# EAGLE board rev2 12V51A MC34063 15x (EAGLE 8.5.1)
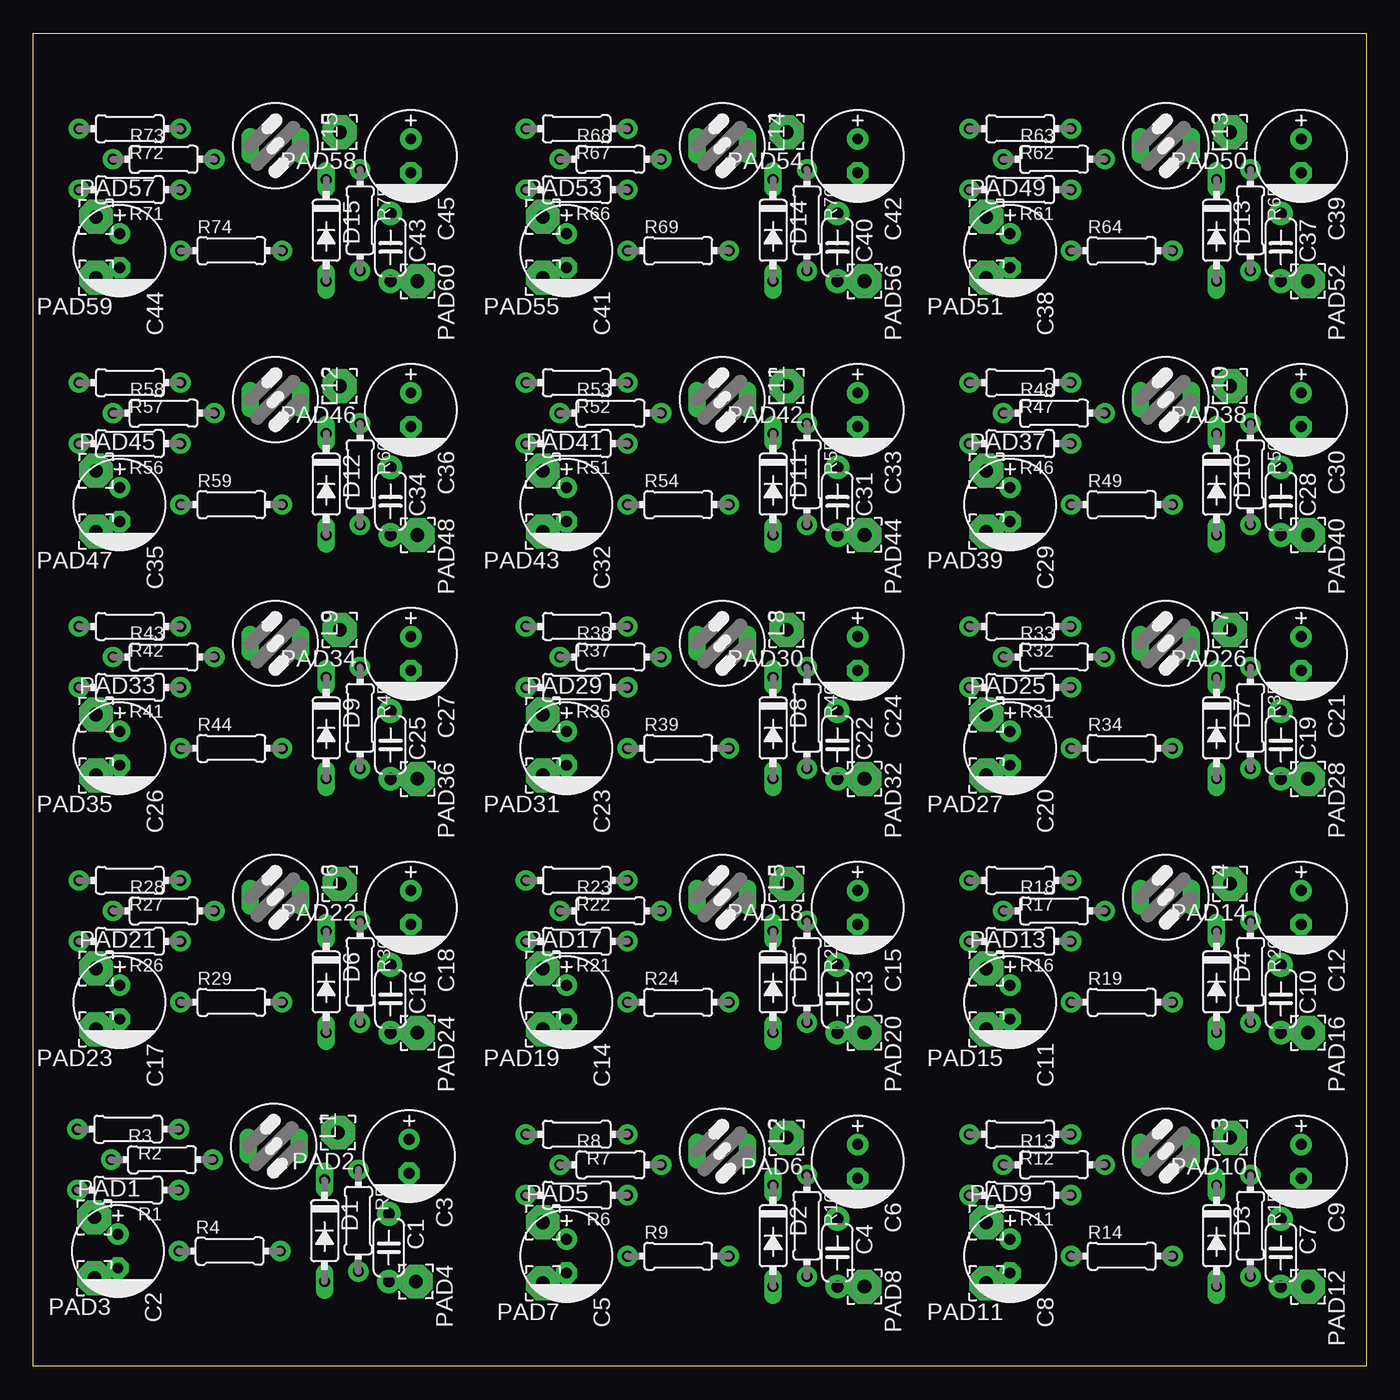
[diagram p0: board, top side]
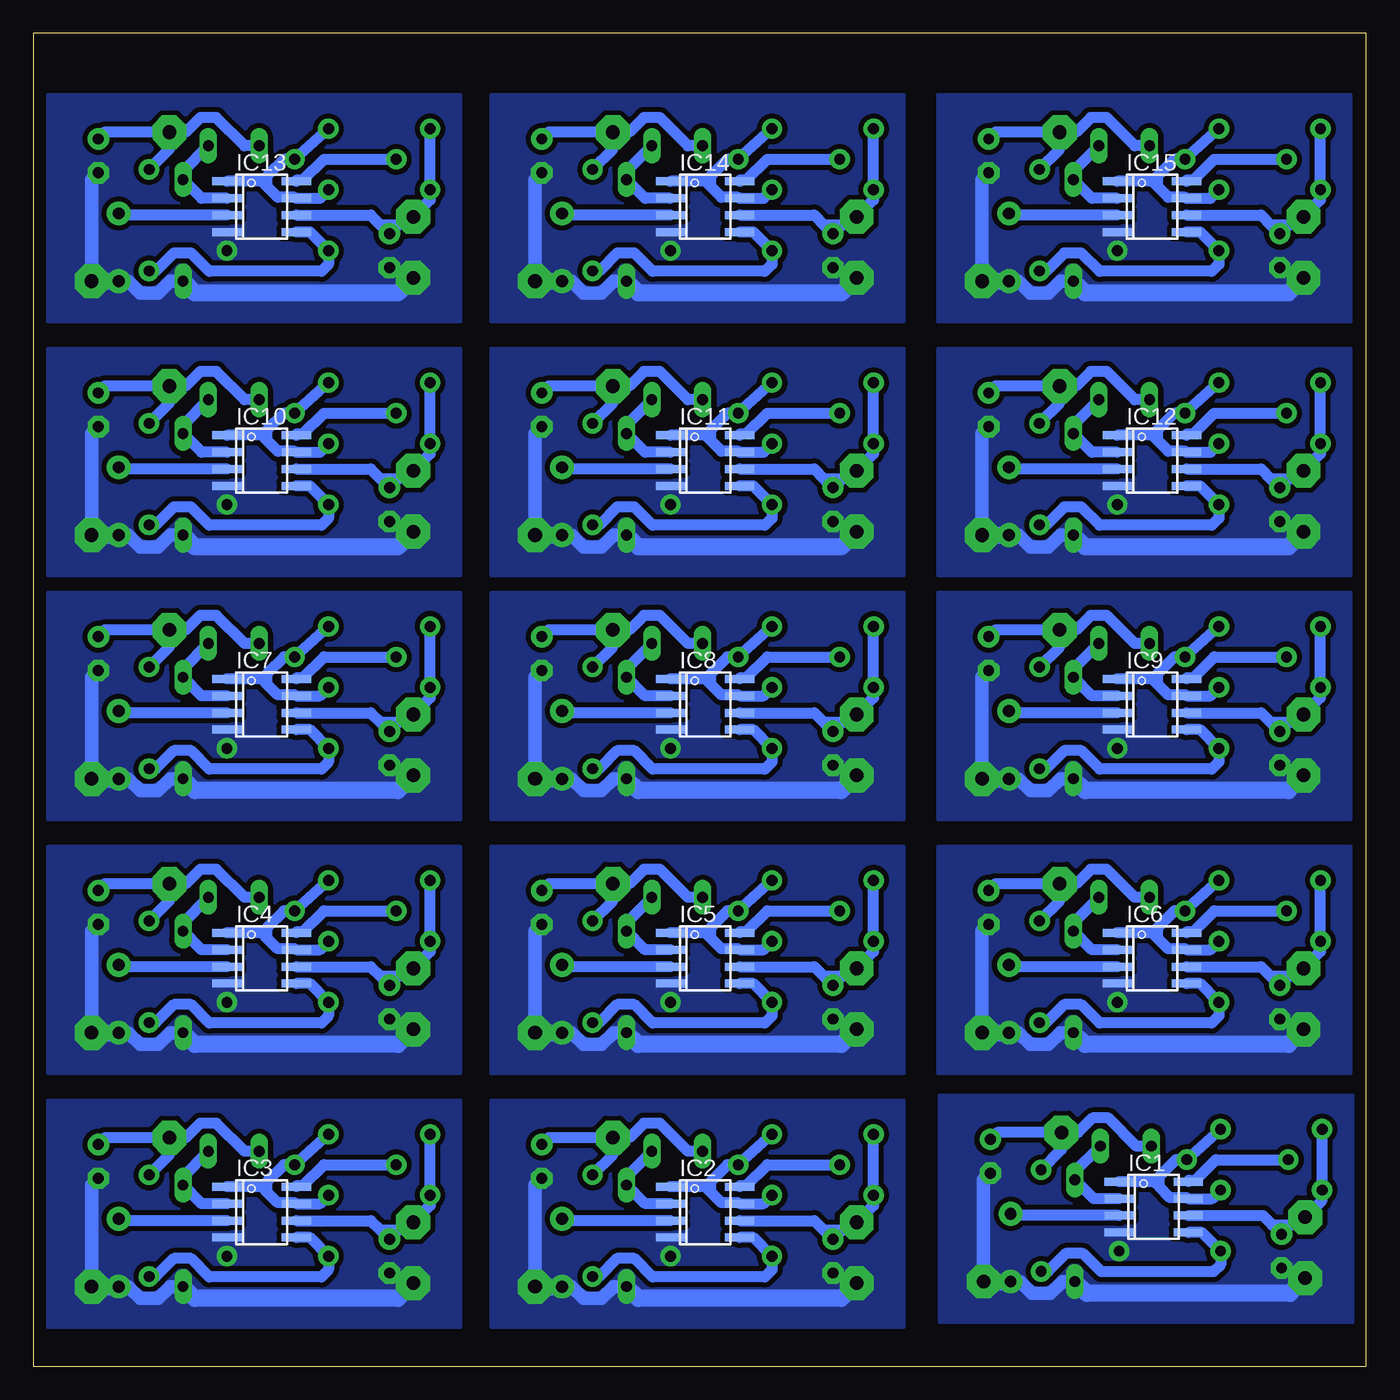
[diagram p1: board, bottom side, seen from below]

Size 100 x 100 mm. Coordinates in mm from the lower left corner, seen from the top.
Outline: 0,0 0,100 100,100 100,0 0,0
Copper layers (1*16): Top 0.035mm / dielectric 1.5mm / Bottom 0.035mm
Design rules "default *": minimum track width 6mil, minimum drill 0.35mm, track to track 6mil, track to pad 6mil, pad to pad 6mil, via to via 6mil, smd to smd 6mil, copper to edge 20mil, drill to drill 6mil, minimum pad ring 10mil, minimum via ring 8mil, stop-mask expansion 4mil, vias tented up to drill 0mil, thermal gap 10mil
Net classes: 0 default: clearance 0.381 mm

## Footprints (pad centres in the part's own frame; a part is rotated, then mirrored left to right if it is on the bottom)
C050-024X044 = drill 0.889 pad 1.778: 1 -2.54,0; 2 2.54,0
E2,5-7 = drill 0.813 pad 1.6: + -1.27,0 | drill 0.813 pad 1.6 octagon: - 1.27,0
DO35-7 = drill 0.813 long: A 3.81,0; C -3.81,0
SOIC8 = smd 0.6 x 2.2: 1 -1.905,-2.6; 2 -0.635,-2.6; 3 0.635,-2.6; 4 1.905,-2.6; 5 1.905,2.6; 6 0.635,2.6; 7 -0.635,2.6; 8 -1.905,2.6
82114R = drill 0.813 long: 1 0,1.905; 2 0,-1.905
2,54/1,0 = drill 1.016 pad 2.54 octagon: 1 0,0
0204/7 = drill 0.813 pad 1.524: 1 -3.81,0; 2 3.81,0

## Placement (x,y rotation side)
C1  330pF  [C050-024X044]  26.67,8.89 270 top
C2  1000uF/25V  [E2,5-7]  6.35,8.64 270 top
C3  100uF/10V  [E2,5-7]  28.19,15.75 270 top
C4  330pF  [C050-024X044]  60.33,8.51 270 top
C5  1000uF/25V  [E2,5-7]  40.01,8.26 270 top
C6  100uF/10V  [E2,5-7]  61.85,15.37 270 top
C7  330pF  [C050-024X044]  93.6,8.51 270 top
C8  1000uF/25V  [E2,5-7]  73.28,8.26 270 top
C9  100uF/10V  [E2,5-7]  95.12,15.37 270 top
C10  330pF  [C050-024X044]  93.6,27.56 270 top
C11  1000uF/25V  [E2,5-7]  73.28,27.3 270 top
C12  100uF/10V  [E2,5-7]  95.12,34.42 270 top
C13  330pF  [C050-024X044]  60.33,27.56 270 top
C14  1000uF/25V  [E2,5-7]  40.01,27.3 270 top
C15  100uF/10V  [E2,5-7]  61.85,34.42 270 top
C16  330pF  [C050-024X044]  26.8,27.56 270 top
C17  1000uF/25V  [E2,5-7]  6.48,27.3 270 top
C18  100uF/10V  [E2,5-7]  28.32,34.42 270 top
C19  330pF  [C050-024X044]  93.6,46.61 270 top
C20  1000uF/25V  [E2,5-7]  73.28,46.35 270 top
C21  100uF/10V  [E2,5-7]  95.12,53.47 270 top
C22  330pF  [C050-024X044]  60.33,46.61 270 top
C23  1000uF/25V  [E2,5-7]  40.01,46.35 270 top
C24  100uF/10V  [E2,5-7]  61.85,53.47 270 top
C25  330pF  [C050-024X044]  26.8,46.61 270 top
C26  1000uF/25V  [E2,5-7]  6.48,46.35 270 top
C27  100uF/10V  [E2,5-7]  28.32,53.47 270 top
C28  330pF  [C050-024X044]  93.6,64.9 270 top
C29  1000uF/25V  [E2,5-7]  73.28,64.64 270 top
C30  100uF/10V  [E2,5-7]  95.12,71.75 270 top
C31  330pF  [C050-024X044]  60.33,64.9 270 top
C32  1000uF/25V  [E2,5-7]  40.01,64.64 270 top
C33  100uF/10V  [E2,5-7]  61.85,71.75 270 top
C34  330pF  [C050-024X044]  26.8,64.9 270 top
C35  1000uF/25V  [E2,5-7]  6.48,64.64 270 top
C36  100uF/10V  [E2,5-7]  28.32,71.75 270 top
C37  330pF  [C050-024X044]  93.6,83.95 270 top
C38  1000uF/25V  [E2,5-7]  73.28,83.69 270 top
C39  100uF/10V  [E2,5-7]  95.12,90.81 270 top
C40  330pF  [C050-024X044]  60.33,83.95 270 top
C41  1000uF/25V  [E2,5-7]  40.01,83.69 270 top
C42  100uF/10V  [E2,5-7]  61.85,90.81 270 top
C43  330pF  [C050-024X044]  26.8,83.95 270 top
C44  1000uF/25V  [E2,5-7]  6.48,83.69 270 top
C45  100uF/10V  [E2,5-7]  28.32,90.81 270 top
D1  MUR420  [DO35-7]  21.84,10.16 270 top
D2  MUR420  [DO35-7]  55.5,9.78 270 top
D3  MUR420  [DO35-7]  88.77,9.78 270 top
D4  MUR420  [DO35-7]  88.77,28.83 270 top
D5  MUR420  [DO35-7]  55.5,28.83 270 top
D6  MUR420  [DO35-7]  21.97,28.83 270 top
D7  MUR420  [DO35-7]  88.77,47.88 270 top
D8  MUR420  [DO35-7]  55.5,47.88 270 top
D9  MUR420  [DO35-7]  21.97,47.88 270 top
D10  MUR420  [DO35-7]  88.77,66.17 270 top
D11  MUR420  [DO35-7]  55.5,66.17 270 top
D12  MUR420  [DO35-7]  21.97,66.17 270 top
D13  MUR420  [DO35-7]  88.77,85.22 270 top
D14  MUR420  [DO35-7]  55.5,85.22 270 top
D15  MUR420  [DO35-7]  21.97,85.22 270 top
IC1  MC34063AD  [SOIC8]  15.94,11.94 270 bottom
IC2  MC34063AD  [SOIC8]  49.6,11.56 270 bottom
IC3  MC34063AD  [SOIC8]  82.87,11.56 270 bottom
IC4  MC34063AD  [SOIC8]  82.87,30.61 270 bottom
IC5  MC34063AD  [SOIC8]  49.6,30.61 270 bottom
IC6  MC34063AD  [SOIC8]  16.07,30.61 270 bottom
IC7  MC34063AD  [SOIC8]  82.87,49.66 270 bottom
IC8  MC34063AD  [SOIC8]  49.6,49.66 270 bottom
IC9  MC34063AD  [SOIC8]  16.07,49.66 270 bottom
IC10  MC34063AD  [SOIC8]  82.87,67.94 270 bottom
IC11  MC34063AD  [SOIC8]  49.6,67.94 270 bottom
IC12  MC34063AD  [SOIC8]  16.07,67.94 270 bottom
IC13  MC34063AD  [SOIC8]  82.87,87 270 bottom
IC14  MC34063AD  [SOIC8]  49.6,87 270 bottom
IC15  MC34063AD  [SOIC8]  16.07,87 270 bottom
L1  1mH  [82114R]  18.03,16.51 270 top
L2  1mH  [82114R]  51.69,16.13 270 top
L3  1mH  [82114R]  84.96,16.13 270 top
L4  1mH  [82114R]  84.96,35.18 270 top
L5  1mH  [82114R]  51.69,35.18 270 top
L6  1mH  [82114R]  18.16,35.18 270 top
L7  1mH  [82114R]  84.96,54.23 270 top
L8  1mH  [82114R]  51.69,54.23 270 top
L9  1mH  [82114R]  18.16,54.23 270 top
L10  1mH  [82114R]  84.96,72.52 270 top
L11  1mH  [82114R]  51.69,72.52 270 top
L12  1mH  [82114R]  18.16,72.52 270 top
L13  1mH  [82114R]  84.96,91.57 270 top
L14  1mH  [82114R]  51.69,91.57 270 top
L15  1mH  [82114R]  18.16,91.57 270 top
PAD1  [2,54/1,0]  4.57,11.18 0 top
PAD2  [2,54/1,0]  22.86,17.53 180 top
PAD3  [2,54/1,0]  4.57,6.6 180 top
PAD4  [2,54/1,0]  28.7,6.35 270 top
PAD5  [2,54/1,0]  38.23,10.79 0 top
PAD6  [2,54/1,0]  56.52,17.14 180 top
PAD7  [2,54/1,0]  38.23,6.22 180 top
PAD8  [2,54/1,0]  62.36,5.97 270 top
PAD9  [2,54/1,0]  71.5,10.79 0 top
PAD10  [2,54/1,0]  89.79,17.14 180 top
PAD11  [2,54/1,0]  71.5,6.22 180 top
PAD12  [2,54/1,0]  95.63,5.97 270 top
PAD13  [2,54/1,0]  71.5,29.84 0 top
PAD14  [2,54/1,0]  89.79,36.2 180 top
PAD15  [2,54/1,0]  71.5,25.27 180 top
PAD16  [2,54/1,0]  95.63,25.02 270 top
PAD17  [2,54/1,0]  38.23,29.84 0 top
PAD18  [2,54/1,0]  56.52,36.2 180 top
PAD19  [2,54/1,0]  38.23,25.27 180 top
PAD20  [2,54/1,0]  62.36,25.02 270 top
PAD21  [2,54/1,0]  4.7,29.84 0 top
PAD22  [2,54/1,0]  22.99,36.2 180 top
PAD23  [2,54/1,0]  4.7,25.27 180 top
PAD24  [2,54/1,0]  28.83,25.02 270 top
PAD25  [2,54/1,0]  71.5,48.9 0 top
PAD26  [2,54/1,0]  89.79,55.24 180 top
PAD27  [2,54/1,0]  71.5,44.32 180 top
PAD28  [2,54/1,0]  95.63,44.07 270 top
PAD29  [2,54/1,0]  38.23,48.9 0 top
PAD30  [2,54/1,0]  56.52,55.24 180 top
PAD31  [2,54/1,0]  38.23,44.32 180 top
PAD32  [2,54/1,0]  62.36,44.07 270 top
PAD33  [2,54/1,0]  4.7,48.9 0 top
PAD34  [2,54/1,0]  22.99,55.24 180 top
PAD35  [2,54/1,0]  4.7,44.32 180 top
PAD36  [2,54/1,0]  28.83,44.07 270 top
PAD37  [2,54/1,0]  71.5,67.18 0 top
PAD38  [2,54/1,0]  89.79,73.53 180 top
PAD39  [2,54/1,0]  71.5,62.61 180 top
PAD40  [2,54/1,0]  95.63,62.36 270 top
PAD41  [2,54/1,0]  38.23,67.18 0 top
PAD42  [2,54/1,0]  56.52,73.53 180 top
PAD43  [2,54/1,0]  38.23,62.61 180 top
PAD44  [2,54/1,0]  62.36,62.36 270 top
PAD45  [2,54/1,0]  4.7,67.18 0 top
PAD46  [2,54/1,0]  22.99,73.53 180 top
PAD47  [2,54/1,0]  4.7,62.61 180 top
PAD48  [2,54/1,0]  28.83,62.36 270 top
PAD49  [2,54/1,0]  71.5,86.23 0 top
PAD50  [2,54/1,0]  89.79,92.58 180 top
PAD51  [2,54/1,0]  71.5,81.66 180 top
PAD52  [2,54/1,0]  95.63,81.41 270 top
PAD53  [2,54/1,0]  38.23,86.23 0 top
PAD54  [2,54/1,0]  56.52,92.58 180 top
PAD55  [2,54/1,0]  38.23,81.66 180 top
PAD56  [2,54/1,0]  62.36,81.41 270 top
PAD57  [2,54/1,0]  4.7,86.23 0 top
PAD58  [2,54/1,0]  22.99,92.58 180 top
PAD59  [2,54/1,0]  4.7,81.66 180 top
PAD60  [2,54/1,0]  28.83,81.41 270 top
R1  1R  [0204/7]  7.11,13.21 180 top
R2  1R  [0204/7]  7.11,17.78 180 top
R3  220R  [0204/7]  9.65,15.49 0 top
R4  2.2k  [0204/7]  14.73,8.64 0 top
R5  6.8k  [0204/7]  24.38,10.92 270 top
R6  1R  [0204/7]  40.77,12.83 180 top
R7  1R  [0204/7]  40.77,17.4 180 top
R8  220R  [0204/7]  43.31,15.11 0 top
R9  2.2k  [0204/7]  48.39,8.26 0 top
R10  6.8k  [0204/7]  58.04,10.54 270 top
R11  1R  [0204/7]  74.04,12.83 180 top
R12  1R  [0204/7]  74.04,17.4 180 top
R13  220R  [0204/7]  76.58,15.11 0 top
R14  2.2k  [0204/7]  81.66,8.26 0 top
R15  6.8k  [0204/7]  91.31,10.54 270 top
R16  1R  [0204/7]  74.04,31.88 180 top
R17  1R  [0204/7]  74.04,36.45 180 top
R18  220R  [0204/7]  76.58,34.16 0 top
R19  2.2k  [0204/7]  81.66,27.3 0 top
R20  6.8k  [0204/7]  91.31,29.59 270 top
R21  1R  [0204/7]  40.77,31.88 180 top
R22  1R  [0204/7]  40.77,36.45 180 top
R23  220R  [0204/7]  43.31,34.16 0 top
R24  2.2k  [0204/7]  48.39,27.3 0 top
R25  6.8k  [0204/7]  58.04,29.59 270 top
R26  1R  [0204/7]  7.24,31.88 180 top
R27  1R  [0204/7]  7.24,36.45 180 top
R28  220R  [0204/7]  9.78,34.16 0 top
R29  2.2k  [0204/7]  14.86,27.3 0 top
R30  6.8k  [0204/7]  24.51,29.59 270 top
R31  1R  [0204/7]  74.04,50.93 180 top
R32  1R  [0204/7]  74.04,55.5 180 top
R33  220R  [0204/7]  76.58,53.21 0 top
R34  2.2k  [0204/7]  81.66,46.35 0 top
R35  6.8k  [0204/7]  91.31,48.64 270 top
R36  1R  [0204/7]  40.77,50.93 180 top
R37  1R  [0204/7]  40.77,55.5 180 top
R38  220R  [0204/7]  43.31,53.21 0 top
R39  2.2k  [0204/7]  48.39,46.35 0 top
R40  6.8k  [0204/7]  58.04,48.64 270 top
R41  1R  [0204/7]  7.24,50.93 180 top
R42  1R  [0204/7]  7.24,55.5 180 top
R43  220R  [0204/7]  9.78,53.21 0 top
R44  2.2k  [0204/7]  14.86,46.35 0 top
R45  6.8k  [0204/7]  24.51,48.64 270 top
R46  1R  [0204/7]  74.04,69.22 180 top
R47  1R  [0204/7]  74.04,73.79 180 top
R48  220R  [0204/7]  76.58,71.5 0 top
R49  2.2k  [0204/7]  81.66,64.64 0 top
R50  6.8k  [0204/7]  91.31,66.93 270 top
R51  1R  [0204/7]  40.77,69.22 180 top
R52  1R  [0204/7]  40.77,73.79 180 top
R53  220R  [0204/7]  43.31,71.5 0 top
R54  2.2k  [0204/7]  48.39,64.64 0 top
R55  6.8k  [0204/7]  58.04,66.93 270 top
R56  1R  [0204/7]  7.24,69.22 180 top
R57  1R  [0204/7]  7.24,73.79 180 top
R58  220R  [0204/7]  9.78,71.5 0 top
R59  2.2k  [0204/7]  14.86,64.64 0 top
R60  6.8k  [0204/7]  24.51,66.93 270 top
R61  1R  [0204/7]  74.04,88.27 180 top
R62  1R  [0204/7]  74.04,92.84 180 top
R63  220R  [0204/7]  76.58,90.55 0 top
R64  2.2k  [0204/7]  81.66,83.69 0 top
R65  6.8k  [0204/7]  91.31,85.98 270 top
R66  1R  [0204/7]  40.77,88.27 180 top
R67  1R  [0204/7]  40.77,92.84 180 top
R68  220R  [0204/7]  43.31,90.55 0 top
R69  2.2k  [0204/7]  48.39,83.69 0 top
R70  6.8k  [0204/7]  58.04,85.98 270 top
R71  1R  [0204/7]  7.24,88.27 180 top
R72  1R  [0204/7]  7.24,92.84 180 top
R73  220R  [0204/7]  9.78,90.55 0 top
R74  2.2k  [0204/7]  14.86,83.69 0 top
R75  6.8k  [0204/7]  24.51,85.98 270 top

## Library data of the parts
C1-C45 = rcl; SPICEPREFIX: C
D1-D15 = diode
IC1-IC15 = mc34063
L1-L15 = inductors; SPICEPREFIX: L
PAD1-PAD60 = wirepad
R1-R75 = rcl; SPICEPREFIX: R

## Nets
+5V: C3.+ L1.2 PAD2.1 R5.1
+5V1: C6.+ L2.2 PAD6.1 R10.1
+5V2: C9.+ L3.2 PAD10.1 R15.1
+5V3: C12.+ L4.2 PAD14.1 R20.1
+5V4: C15.+ L5.2 PAD18.1 R25.1
+5V5: C18.+ L6.2 PAD22.1 R30.1
+5V6: C21.+ L7.2 PAD26.1 R35.1
+5V7: C24.+ L8.2 PAD30.1 R40.1
+5V8: C27.+ L9.2 PAD34.1 R45.1
+5V9: C30.+ L10.2 PAD38.1 R50.1
+5V10: C33.+ L11.2 PAD42.1 R55.1
+5V11: C36.+ L12.2 PAD46.1 R60.1
+5V12: C39.+ L13.2 PAD50.1 R65.1
+5V13: C42.+ L14.2 PAD54.1 R70.1
+5V14: C45.+ L15.2 PAD58.1 R75.1
+12V: C2.+ IC1.6 PAD1.1 R1.2 R2.2
+12V1: C5.+ IC2.6 PAD5.1 R6.2 R7.2
+12V2: C8.+ IC3.6 PAD9.1 R11.2 R12.2
+12V3: C11.+ IC4.6 PAD13.1 R16.2 R17.2
+12V4: C14.+ IC5.6 PAD17.1 R21.2 R22.2
+12V5: C17.+ IC6.6 PAD21.1 R26.2 R27.2
+12V6: C20.+ IC7.6 PAD25.1 R31.2 R32.2
+12V7: C23.+ IC8.6 PAD29.1 R36.2 R37.2
+12V8: C26.+ IC9.6 PAD33.1 R41.2 R42.2
+12V9: C29.+ IC10.6 PAD37.1 R46.2 R47.2
+12V10: C32.+ IC11.6 PAD41.1 R51.2 R52.2
+12V11: C35.+ IC12.6 PAD45.1 R56.2 R57.2
+12V12: C38.+ IC13.6 PAD49.1 R61.2 R62.2
+12V13: C41.+ IC14.6 PAD53.1 R66.2 R67.2
+12V14: C44.+ IC15.6 PAD57.1 R71.2 R72.2
FB: IC1.5 R4.1 R5.2
FB1: IC2.5 R9.1 R10.2
FB2: IC3.5 R14.1 R15.2
FB3: IC4.5 R19.1 R20.2
FB4: IC5.5 R24.1 R25.2
FB5: IC6.5 R29.1 R30.2
FB6: IC7.5 R34.1 R35.2
FB7: IC8.5 R39.1 R40.2
FB8: IC9.5 R44.1 R45.2
FB9: IC10.5 R49.1 R50.2
FB10: IC11.5 R54.1 R55.2
FB11: IC12.5 R59.1 R60.2
FB12: IC13.5 R64.1 R65.2
FB13: IC14.5 R69.1 R70.2
FB14: IC15.5 R74.1 R75.2
GND: C1.2 C2.- C3.- D1.A IC1.4 PAD3.1 PAD4.1 R4.2
GND1: C4.2 C5.- C6.- D2.A IC2.4 PAD7.1 PAD8.1 R9.2
GND2: C7.2 C8.- C9.- D3.A IC3.4 PAD11.1 PAD12.1 R14.2
GND3: C10.2 C11.- C12.- D4.A IC4.4 PAD15.1 PAD16.1 R19.2
GND4: C13.2 C14.- C15.- D5.A IC5.4 PAD19.1 PAD20.1 R24.2
GND5: C16.2 C17.- C18.- D6.A IC6.4 PAD23.1 PAD24.1 R29.2
GND6: C19.2 C20.- C21.- D7.A IC7.4 PAD27.1 PAD28.1 R34.2
GND7: C22.2 C23.- C24.- D8.A IC8.4 PAD31.1 PAD32.1 R39.2
GND8: C25.2 C26.- C27.- D9.A IC9.4 PAD35.1 PAD36.1 R44.2
GND9: C28.2 C29.- C30.- D10.A IC10.4 PAD39.1 PAD40.1 R49.2
GND10: C31.2 C32.- C33.- D11.A IC11.4 PAD43.1 PAD44.1 R54.2
GND11: C34.2 C35.- C36.- D12.A IC12.4 PAD47.1 PAD48.1 R59.2
GND12: C37.2 C38.- C39.- D13.A IC13.4 PAD51.1 PAD52.1 R64.2
GND13: C40.2 C41.- C42.- D14.A IC14.4 PAD55.1 PAD56.1 R69.2
GND14: C43.2 C44.- C45.- D15.A IC15.4 PAD59.1 PAD60.1 R74.2
N$1: IC1.1 IC1.7 R1.1 R2.1 R3.2
N$2: IC2.1 IC2.7 R6.1 R7.1 R8.2
N$3: D1.C IC1.2 L1.1
N$4: IC1.8 R3.1
N$5: IC2.8 R8.1
N$6: C4.1 IC2.3
N$7: C1.1 IC1.3
N$8: D2.C IC2.2 L2.1
N$9: IC3.1 IC3.7 R11.1 R12.1 R13.2
N$10: IC3.8 R13.1
N$11: C7.1 IC3.3
N$12: D3.C IC3.2 L3.1
N$13: IC4.1 IC4.7 R16.1 R17.1 R18.2
N$14: IC4.8 R18.1
N$15: C10.1 IC4.3
N$16: D4.C IC4.2 L4.1
N$17: IC5.1 IC5.7 R21.1 R22.1 R23.2
N$18: IC5.8 R23.1
N$19: C13.1 IC5.3
N$20: D5.C IC5.2 L5.1
N$21: IC6.1 IC6.7 R26.1 R27.1 R28.2
N$22: IC6.8 R28.1
N$23: C16.1 IC6.3
N$24: D6.C IC6.2 L6.1
N$25: IC7.1 IC7.7 R31.1 R32.1 R33.2
N$26: IC7.8 R33.1
N$27: C19.1 IC7.3
N$28: D7.C IC7.2 L7.1
N$29: IC8.1 IC8.7 R36.1 R37.1 R38.2
N$30: IC8.8 R38.1
N$31: C22.1 IC8.3
N$32: D8.C IC8.2 L8.1
N$33: IC9.1 IC9.7 R41.1 R42.1 R43.2
N$34: IC9.8 R43.1
N$35: C25.1 IC9.3
N$36: D9.C IC9.2 L9.1
N$37: IC10.1 IC10.7 R46.1 R47.1 R48.2
N$38: IC10.8 R48.1
N$39: C28.1 IC10.3
N$40: D10.C IC10.2 L10.1
N$41: IC11.1 IC11.7 R51.1 R52.1 R53.2
N$42: IC11.8 R53.1
N$43: C31.1 IC11.3
N$44: D11.C IC11.2 L11.1
N$45: IC12.1 IC12.7 R56.1 R57.1 R58.2
N$46: IC12.8 R58.1
N$47: C34.1 IC12.3
N$48: D12.C IC12.2 L12.1
N$49: IC13.1 IC13.7 R61.1 R62.1 R63.2
N$50: IC13.8 R63.1
N$51: C37.1 IC13.3
N$52: D13.C IC13.2 L13.1
N$53: IC14.1 IC14.7 R66.1 R67.1 R68.2
N$54: IC14.8 R68.1
N$55: C40.1 IC14.3
N$56: D14.C IC14.2 L14.1
N$57: IC15.1 IC15.7 R71.1 R72.1 R73.2
N$58: IC15.8 R73.1
N$59: C43.1 IC15.3
N$60: D15.C IC15.2 L15.1

## Tracks (layer width: path | path; a pad name or v marks a point on that pad's centre or on a via)
+5V
  Bottom 0.813: L1.2 17.23,16.51 19.34,18.62 20.54,18.62 21.63,17.53 PAD2.1 | PAD2.1 27.69,17.53 C3.+ | R5.1 22.86,16.26 PAD2.1
+5V1
  Bottom 0.813: L2.2 50.89,16.13 52.99,18.24 54.19,18.24 55.29,17.14 PAD6.1 | PAD6.1 61.34,17.14 C6.+ | R10.1 56.52,15.88 PAD6.1
+5V2
  Bottom 0.813: L3.2 84.16,16.13 86.27,18.24 87.47,18.24 88.56,17.14 PAD10.1 | PAD10.1 94.61,17.14 C9.+ | R15.1 89.79,15.88 PAD10.1
+5V3
  Bottom 0.813: L4.2 84.16,35.18 86.27,37.29 87.47,37.29 88.56,36.2 PAD14.1 | PAD14.1 94.61,36.2 C12.+ | R20.1 89.79,34.92 PAD14.1
+5V4
  Bottom 0.813: L5.2 50.89,35.18 52.99,37.29 54.19,37.29 55.29,36.2 PAD18.1 | PAD18.1 61.34,36.2 C15.+ | R25.1 56.52,34.92 PAD18.1
+5V5
  Bottom 0.813: L6.2 17.36,35.18 19.47,37.29 20.67,37.29 21.76,36.2 PAD22.1 | PAD22.1 27.81,36.2 C18.+ | R30.1 22.99,34.92 PAD22.1
+5V6
  Bottom 0.813: L7.2 84.16,54.23 86.27,56.34 87.47,56.34 88.56,55.24 PAD26.1 | PAD26.1 94.61,55.24 C21.+ | R35.1 89.79,53.98 PAD26.1
+5V7
  Bottom 0.813: L8.2 50.89,54.23 52.99,56.34 54.19,56.34 55.29,55.24 PAD30.1 | PAD30.1 61.34,55.24 C24.+ | R40.1 56.52,53.98 PAD30.1
+5V8
  Bottom 0.813: L9.2 17.36,54.23 19.47,56.34 20.67,56.34 21.76,55.24 PAD34.1 | PAD34.1 27.81,55.24 C27.+ | R45.1 22.99,53.98 PAD34.1
+5V9
  Bottom 0.813: L10.2 84.16,72.52 86.27,74.62 87.47,74.62 88.56,73.53 PAD38.1 | PAD38.1 94.61,73.53 C30.+ | R50.1 89.79,72.26 PAD38.1
+5V10
  Bottom 0.813: L11.2 50.89,72.52 52.99,74.62 54.19,74.62 55.29,73.53 PAD42.1 | PAD42.1 61.34,73.53 C33.+ | R55.1 56.52,72.26 PAD42.1
+5V11
  Bottom 0.813: L12.2 17.36,72.52 19.47,74.62 20.67,74.62 21.76,73.53 PAD46.1 | PAD46.1 27.81,73.53 C36.+ | R60.1 22.99,72.26 PAD46.1
+5V12
  Bottom 0.813: L13.2 84.16,91.57 86.27,93.67 87.47,93.67 88.56,92.58 PAD50.1 | PAD50.1 94.61,92.58 C39.+ | R65.1 89.79,91.31 PAD50.1
+5V13
  Bottom 0.813: L14.2 50.89,91.57 52.99,93.67 54.19,93.67 55.29,92.58 PAD54.1 | PAD54.1 61.34,92.58 C42.+ | R70.1 56.52,91.31 PAD54.1
+5V14
  Bottom 0.813: L15.2 17.36,91.57 19.47,93.67 20.67,93.67 21.76,92.58 PAD58.1 | PAD58.1 27.81,92.58 C45.+ | R75.1 22.99,91.31 PAD58.1
+12V
  Bottom 0.813: IC1.6 7.75,11.3 7.05,10.6 | 7.05,10.6 C2.+ 5.65,10.6 | 5.65,10.6 5.08,11.18 PAD1.1 3.3,12.45 R1.2 R2.2 | 7.05,10.6 5.65,10.6
+12V1
  Bottom 0.813: IC2.6 41.4,10.92 40.7,10.22 | 40.7,10.22 C5.+ 39.31,10.22 | 39.31,10.22 38.73,10.79 PAD5.1 36.96,12.06 R6.2 R7.2 | 40.7,10.22 39.31,10.22
+12V2
  Bottom 0.813: IC3.6 74.68,10.92 73.98,10.22 | 73.98,10.22 C8.+ 72.58,10.22 | 72.58,10.22 72.01,10.79 PAD9.1 70.23,12.06 R11.2 R12.2 | 73.98,10.22 72.58,10.22
+12V3
  Bottom 0.813: IC4.6 74.68,29.97 73.98,29.27 | 73.98,29.27 C11.+ 72.58,29.27 | 72.58,29.27 72.01,29.84 PAD13.1 70.23,31.11 R16.2 R17.2 | 73.98,29.27 72.58,29.27
+12V4
  Bottom 0.813: IC5.6 41.4,29.97 40.7,29.27 | 40.7,29.27 C14.+ 39.31,29.27 | 39.31,29.27 38.73,29.84 PAD17.1 36.96,31.11 R21.2 R22.2 | 40.7,29.27 39.31,29.27
+12V5
  Bottom 0.813: IC6.6 7.87,29.97 7.18,29.27 | 7.18,29.27 C17.+ 5.78,29.27 | 5.78,29.27 5.21,29.84 PAD21.1 3.43,31.11 R26.2 R27.2 | 7.18,29.27 5.78,29.27
+12V6
  Bottom 0.813: IC7.6 74.68,49.02 73.98,48.32 | 73.98,48.32 C20.+ 72.58,48.32 | 72.58,48.32 72.01,48.9 PAD25.1 70.23,50.16 R31.2 R32.2 | 73.98,48.32 72.58,48.32
+12V7
  Bottom 0.813: IC8.6 41.4,49.02 40.7,48.32 | 40.7,48.32 C23.+ 39.31,48.32 | 39.31,48.32 38.73,48.9 PAD29.1 36.96,50.16 R36.2 R37.2 | 40.7,48.32 39.31,48.32
+12V8
  Bottom 0.813: IC9.6 7.87,49.02 7.18,48.32 | 7.18,48.32 C26.+ 5.78,48.32 | 5.78,48.32 5.21,48.9 PAD33.1 3.43,50.16 R41.2 R42.2 | 7.18,48.32 5.78,48.32
+12V9
  Bottom 0.813: IC10.6 74.68,67.31 73.98,66.61 | 73.98,66.61 C29.+ 72.58,66.61 | 72.58,66.61 72.01,67.18 PAD37.1 70.23,68.45 R46.2 R47.2 | 73.98,66.61 72.58,66.61
+12V10
  Bottom 0.813: IC11.6 41.4,67.31 40.7,66.61 | 40.7,66.61 C32.+ 39.31,66.61 | 39.31,66.61 38.73,67.18 PAD41.1 36.96,68.45 R51.2 R52.2 | 40.7,66.61 39.31,66.61
+12V11
  Bottom 0.813: IC12.6 7.87,67.31 7.18,66.61 | 7.18,66.61 C35.+ 5.78,66.61 | 5.78,66.61 5.21,67.18 PAD45.1 3.43,68.45 R56.2 R57.2 | 7.18,66.61 5.78,66.61
+12V12
  Bottom 0.813: IC13.6 74.68,86.36 73.98,85.66 | 73.98,85.66 C38.+ 72.58,85.66 | 72.58,85.66 72.01,86.23 PAD49.1 70.23,87.5 R61.2 R62.2 | 73.98,85.66 72.58,85.66
+12V13
  Bottom 0.813: IC14.6 41.4,86.36 40.7,85.66 | 40.7,85.66 C41.+ 39.31,85.66 | 39.31,85.66 38.73,86.23 PAD53.1 36.96,87.5 R66.2 R67.2 | 40.7,85.66 39.31,85.66
+12V14
  Bottom 0.813: IC15.6 7.87,86.36 7.18,85.66 | 7.18,85.66 C44.+ 5.78,85.66 | 5.78,85.66 5.21,86.23 PAD57.1 3.43,87.5 R71.2 R72.2 | 7.18,85.66 5.78,85.66
FB
  Bottom 0.813: R5.2 23.88,7.11 22.54,8.46 21.24,8.46 19.87,7.09 11.46,7.09 10.92,7.62 R4.1 12.32,10.03 IC1.5
FB1
  Bottom 0.813: R10.2 57.54,6.73 56.19,8.08 54.9,8.08 53.53,6.71 45.11,6.71 44.58,7.24 R9.1 45.97,9.65 IC2.5
FB2
  Bottom 0.813: R15.2 90.81,6.73 89.46,8.08 88.17,8.08 86.8,6.71 78.38,6.71 77.85,7.24 R14.1 79.25,9.65 IC3.5
FB3
  Bottom 0.813: R20.2 90.81,25.78 89.46,27.13 88.17,27.13 86.8,25.76 78.38,25.76 77.85,26.29 R19.1 79.25,28.7 IC4.5
FB4
  Bottom 0.813: R25.2 57.54,25.78 56.19,27.13 54.9,27.13 53.53,25.76 45.11,25.76 44.58,26.29 R24.1 45.97,28.7 IC5.5
FB5
  Bottom 0.813: R30.2 24.01,25.78 22.66,27.13 21.37,27.13 20,25.76 11.58,25.76 11.05,26.29 R29.1 12.45,28.7 IC6.5
FB6
  Bottom 0.813: R35.2 90.81,44.83 89.46,46.18 88.17,46.18 86.8,44.81 78.38,44.81 77.85,45.34 R34.1 79.25,47.75 IC7.5
FB7
  Bottom 0.813: R40.2 57.54,44.83 56.19,46.18 54.9,46.18 53.53,44.81 45.11,44.81 44.58,45.34 R39.1 45.97,47.75 IC8.5
FB8
  Bottom 0.813: R45.2 24.01,44.83 22.66,46.18 21.37,46.18 20,44.81 11.58,44.81 11.05,45.34 R44.1 12.45,47.75 IC9.5
FB9
  Bottom 0.813: R50.2 90.81,63.12 89.46,64.47 88.17,64.47 86.8,63.09 78.38,63.09 77.85,63.63 R49.1 79.25,66.04 IC10.5
FB10
  Bottom 0.813: R55.2 57.54,63.12 56.19,64.47 54.9,64.47 53.53,63.09 45.11,63.09 44.58,63.63 R54.1 45.97,66.04 IC11.5
FB11
  Bottom 0.813: R60.2 24.01,63.12 22.66,64.47 21.37,64.47 20,63.09 11.58,63.09 11.05,63.63 R59.1 12.45,66.04 IC12.5
FB12
  Bottom 0.813: R65.2 90.81,82.17 89.46,83.52 88.17,83.52 86.8,82.14 78.38,82.14 77.85,82.68 R64.1 79.25,85.09 IC13.5
FB13
  Bottom 0.813: R70.2 57.54,82.17 56.19,83.52 54.9,83.52 53.53,82.14 45.11,82.14 44.58,82.68 R69.1 45.97,85.09 IC14.5
FB14
  Bottom 0.813: R75.2 24.01,82.17 22.66,83.52 21.37,83.52 20,82.14 11.58,82.14 11.05,82.68 R74.1 12.45,85.09 IC15.5
GND
  Bottom 1.016: D1.A 22.81,6.35 23.7,5.46 25.07,5.46 25.96,6.35 C1.2 | PAD4.1 28.7,13.97 C3.-
  Bottom 1.27: PAD3.1 5.71,5.46 20.95,5.46 D1.A | PAD4.1 C1.2
  pour Bottom (no thermals): 1.02,20.32 32,20.32 32,3.3 1.02,3.3
GND1
  Bottom 1.016: D2.A 56.47,5.97 57.35,5.08 58.72,5.08 59.61,5.97 C4.2 | PAD8.1 62.36,13.59 C6.-
  Bottom 1.27: PAD7.1 39.37,5.08 54.61,5.08 D2.A | PAD8.1 C4.2
  pour Bottom (no thermals): 34.67,19.94 65.66,19.94 65.66,2.92 34.67,2.92
GND2
  Bottom 1.016: D3.A 89.74,5.97 90.63,5.08 92,5.08 92.89,5.97 C7.2 | PAD12.1 95.63,13.59 C9.-
  Bottom 1.27: PAD11.1 72.64,5.08 87.88,5.08 D3.A | PAD12.1 C7.2
  pour Bottom (no thermals): 67.94,19.94 98.93,19.94 98.93,2.92 67.94,2.92
GND3
  Bottom 1.016: D4.A 89.74,25.02 90.63,24.13 92,24.13 92.89,25.02 C10.2 | PAD16.1 95.63,32.64 C12.-
  Bottom 1.27: PAD15.1 72.64,24.13 87.88,24.13 D4.A | PAD16.1 C10.2
  pour Bottom (no thermals): 67.94,38.99 98.93,38.99 98.93,21.97 67.94,21.97
GND4
  Bottom 1.016: D5.A 56.47,25.02 57.35,24.13 58.72,24.13 59.61,25.02 C13.2 | PAD20.1 62.36,32.64 C15.-
  Bottom 1.27: PAD19.1 39.37,24.13 54.61,24.13 D5.A | PAD20.1 C13.2
  pour Bottom (no thermals): 34.67,38.99 65.66,38.99 65.66,21.97 34.67,21.97
GND5
  Bottom 1.016: D6.A 22.94,25.02 23.83,24.13 25.2,24.13 26.08,25.02 C16.2 | PAD24.1 28.83,32.64 C18.-
  Bottom 1.27: PAD23.1 5.84,24.13 21.08,24.13 D6.A | PAD24.1 C16.2
  pour Bottom (no thermals): 1.14,38.99 32.13,38.99 32.13,21.97 1.14,21.97
GND6
  Bottom 1.016: D7.A 89.74,44.07 90.63,43.18 92,43.18 92.89,44.07 C19.2 | PAD28.1 95.63,51.69 C21.-
  Bottom 1.27: PAD27.1 72.64,43.18 87.88,43.18 D7.A | PAD28.1 C19.2
  pour Bottom (no thermals): 67.94,58.04 98.93,58.04 98.93,41.02 67.94,41.02
GND7
  Bottom 1.016: D8.A 56.47,44.07 57.35,43.18 58.72,43.18 59.61,44.07 C22.2 | PAD32.1 62.36,51.69 C24.-
  Bottom 1.27: PAD31.1 39.37,43.18 54.61,43.18 D8.A | PAD32.1 C22.2
  pour Bottom (no thermals): 34.67,58.04 65.66,58.04 65.66,41.02 34.67,41.02
GND8
  Bottom 1.016: D9.A 22.94,44.07 23.83,43.18 25.2,43.18 26.08,44.07 C25.2 | PAD36.1 28.83,51.69 C27.-
  Bottom 1.27: PAD35.1 5.84,43.18 21.08,43.18 D9.A | PAD36.1 C25.2
  pour Bottom (no thermals): 1.14,58.04 32.13,58.04 32.13,41.02 1.14,41.02
GND9
  Bottom 1.016: D10.A 89.74,62.36 90.63,61.47 92,61.47 92.89,62.36 C28.2 | PAD40.1 95.63,69.98 C30.-
  Bottom 1.27: PAD39.1 72.64,61.47 87.88,61.47 D10.A | PAD40.1 C28.2
  pour Bottom (no thermals): 67.94,76.33 98.93,76.33 98.93,59.31 67.94,59.31
GND10
  Bottom 1.016: D11.A 56.47,62.36 57.35,61.47 58.72,61.47 59.61,62.36 C31.2 | PAD44.1 62.36,69.98 C33.-
  Bottom 1.27: PAD43.1 39.37,61.47 54.61,61.47 D11.A | PAD44.1 C31.2
  pour Bottom (no thermals): 34.67,76.33 65.66,76.33 65.66,59.31 34.67,59.31
GND11
  Bottom 1.016: D12.A 22.94,62.36 23.83,61.47 25.2,61.47 26.08,62.36 C34.2 | PAD48.1 28.83,69.98 C36.-
  Bottom 1.27: PAD47.1 5.84,61.47 21.08,61.47 D12.A | PAD48.1 C34.2
  pour Bottom (no thermals): 1.14,76.33 32.13,76.33 32.13,59.31 1.14,59.31
GND12
  Bottom 1.016: D13.A 89.74,81.41 90.63,80.52 92,80.52 92.89,81.41 C37.2 | PAD52.1 95.63,89.03 C39.-
  Bottom 1.27: PAD51.1 72.64,80.52 87.88,80.52 D13.A | PAD52.1 C37.2
  pour Bottom (no thermals): 67.94,95.38 98.93,95.38 98.93,78.36 67.94,78.36
GND13
  Bottom 1.016: D14.A 56.47,81.41 57.35,80.52 58.72,80.52 59.61,81.41 C40.2 | PAD56.1 62.36,89.03 C42.-
  Bottom 1.27: PAD55.1 39.37,80.52 54.61,80.52 D14.A | PAD56.1 C40.2
  pour Bottom (no thermals): 34.67,95.38 65.66,95.38 65.66,78.36 34.67,78.36
GND14
  Bottom 1.016: D15.A 22.94,81.41 23.83,80.52 25.2,80.52 26.08,81.41 C43.2 | PAD60.1 28.83,89.03 C45.-
  Bottom 1.27: PAD59.1 5.84,80.52 21.08,80.52 D15.A | PAD60.1 C43.2
  pour Bottom (no thermals): 1.14,95.38 32.13,95.38 32.13,78.36 1.14,78.36
N$1
  Bottom 0.813: R1.1 11.56,12.57 IC1.7 13.48,12.65 14.72,12.65 15.51,13.44 | R2.1 R3.2 14.27,15.49 15.51,14.24 | 15.92,13.84 IC1.1 | 15.51,13.44 15.92,13.84 | 15.51,14.24 15.92,13.84 | 15.51,13.44 15.51,14.24
N$2
  Bottom 0.813: R6.1 45.21,12.19 IC2.7 47.13,12.27 48.38,12.27 49.17,13.06 | R7.1 R8.2 47.92,15.11 49.17,13.86 | 49.57,13.46 IC2.1 | 49.17,13.06 49.57,13.46 | 49.17,13.86 49.57,13.46 | 49.17,13.06 49.17,13.86
N$3
  Bottom 0.813: IC1.2 20.45,12.57 D1.C 21.84,14.61 L1.1
N$4
  Bottom 0.813: IC1.8 13.3,13.95 12.82,13.95 11.27,15.49 R3.1
N$5
  Bottom 0.813: IC2.8 46.95,13.56 46.48,13.56 44.93,15.11 R8.1
N$6
  Bottom 0.813: IC2.3 60.2,10.92 C4.1
N$7
  Bottom 0.813: IC1.3 26.54,11.3 C1.1
N$8
  Bottom 0.813: IC2.2 54.1,12.19 D2.C 55.5,14.22 L2.1
N$9
  Bottom 0.813: R11.1 78.49,12.19 IC3.7 80.41,12.27 81.65,12.27 82.44,13.06 | R12.1 R13.2 81.19,15.11 82.44,13.86 | 82.84,13.46 IC3.1 | 82.44,13.06 82.84,13.46 | 82.44,13.86 82.84,13.46 | 82.44,13.06 82.44,13.86
N$10
  Bottom 0.813: IC3.8 80.23,13.56 79.75,13.56 78.2,15.11 R13.1
N$11
  Bottom 0.813: IC3.3 93.47,10.92 C7.1
N$12
  Bottom 0.813: IC3.2 87.38,12.19 D3.C 88.77,14.22 L3.1
N$13
  Bottom 0.813: R16.1 78.49,31.24 IC4.7 80.41,31.32 81.65,31.32 82.44,32.11 | R17.1 R18.2 81.19,34.16 82.44,32.91 | 82.84,32.51 IC4.1 | 82.44,32.11 82.84,32.51 | 82.44,32.91 82.84,32.51 | 82.44,32.11 82.44,32.91
N$14
  Bottom 0.813: IC4.8 80.23,32.61 79.75,32.61 78.2,34.16 R18.1
N$15
  Bottom 0.813: IC4.3 93.47,29.97 C10.1
N$16
  Bottom 0.813: IC4.2 87.38,31.24 D4.C 88.77,33.27 L4.1
N$17
  Bottom 0.813: R21.1 45.21,31.24 IC5.7 47.13,31.32 48.38,31.32 49.17,32.11 | R22.1 R23.2 47.92,34.16 49.17,32.91 | 49.57,32.51 IC5.1 | 49.17,32.11 49.57,32.51 | 49.17,32.91 49.57,32.51 | 49.17,32.11 49.17,32.91
N$18
  Bottom 0.813: IC5.8 46.95,32.61 46.48,32.61 44.93,34.16 R23.1
N$19
  Bottom 0.813: IC5.3 60.2,29.97 C13.1
N$20
  Bottom 0.813: IC5.2 54.1,31.24 D5.C 55.5,33.27 L5.1
N$21
  Bottom 0.813: R26.1 11.68,31.24 IC6.7 13.61,31.32 14.85,31.32 15.64,32.11 | R27.1 R28.2 14.39,34.16 15.64,32.91 | 16.04,32.51 IC6.1 | 15.64,32.11 16.04,32.51 | 15.64,32.91 16.04,32.51 | 15.64,32.11 15.64,32.91
N$22
  Bottom 0.813: IC6.8 13.43,32.61 12.95,32.61 11.4,34.16 R28.1
N$23
  Bottom 0.813: IC6.3 26.67,29.97 C16.1
N$24
  Bottom 0.813: IC6.2 20.57,31.24 D6.C 21.97,33.27 L6.1
N$25
  Bottom 0.813: R31.1 78.49,50.29 IC7.7 80.41,50.37 81.65,50.37 82.44,51.16 | R32.1 R33.2 81.19,53.21 82.44,51.96 | 82.84,51.56 IC7.1 | 82.44,51.16 82.84,51.56 | 82.44,51.96 82.84,51.56 | 82.44,51.16 82.44,51.96
N$26
  Bottom 0.813: IC7.8 80.23,51.66 79.75,51.66 78.2,53.21 R33.1
N$27
  Bottom 0.813: IC7.3 93.47,49.02 C19.1
N$28
  Bottom 0.813: IC7.2 87.38,50.29 D7.C 88.77,52.32 L7.1
N$29
  Bottom 0.813: R36.1 45.21,50.29 IC8.7 47.13,50.37 48.38,50.37 49.17,51.16 | R37.1 R38.2 47.92,53.21 49.17,51.96 | 49.57,51.56 IC8.1 | 49.17,51.16 49.57,51.56 | 49.17,51.96 49.57,51.56 | 49.17,51.16 49.17,51.96
N$30
  Bottom 0.813: IC8.8 46.95,51.66 46.48,51.66 44.93,53.21 R38.1
N$31
  Bottom 0.813: IC8.3 60.2,49.02 C22.1
N$32
  Bottom 0.813: IC8.2 54.1,50.29 D8.C 55.5,52.32 L8.1
N$33
  Bottom 0.813: R41.1 11.68,50.29 IC9.7 13.61,50.37 14.85,50.37 15.64,51.16 | R42.1 R43.2 14.39,53.21 15.64,51.96 | 16.04,51.56 IC9.1 | 15.64,51.16 16.04,51.56 | 15.64,51.96 16.04,51.56 | 15.64,51.16 15.64,51.96
N$34
  Bottom 0.813: IC9.8 13.43,51.66 12.95,51.66 11.4,53.21 R43.1
N$35
  Bottom 0.813: IC9.3 26.67,49.02 C25.1
N$36
  Bottom 0.813: IC9.2 20.57,50.29 D9.C 21.97,52.32 L9.1
N$37
  Bottom 0.813: R46.1 78.49,68.58 IC10.7 80.41,68.66 81.65,68.66 82.44,69.45 | R47.1 R48.2 81.19,71.5 82.44,70.25 | 82.84,69.85 IC10.1 | 82.44,69.45 82.84,69.85 | 82.44,70.25 82.84,69.85 | 82.44,69.45 82.44,70.25
N$38
  Bottom 0.813: IC10.8 80.23,69.95 79.75,69.95 78.2,71.5 R48.1
N$39
  Bottom 0.813: IC10.3 93.47,67.31 C28.1
N$40
  Bottom 0.813: IC10.2 87.38,68.58 D10.C 88.77,70.61 L10.1
N$41
  Bottom 0.813: R51.1 45.21,68.58 IC11.7 47.13,68.66 48.38,68.66 49.17,69.45 | R52.1 R53.2 47.92,71.5 49.17,70.25 | 49.57,69.85 IC11.1 | 49.17,69.45 49.57,69.85 | 49.17,70.25 49.57,69.85 | 49.17,69.45 49.17,70.25
N$42
  Bottom 0.813: IC11.8 46.95,69.95 46.48,69.95 44.93,71.5 R53.1
N$43
  Bottom 0.813: IC11.3 60.2,67.31 C31.1
N$44
  Bottom 0.813: IC11.2 54.1,68.58 D11.C 55.5,70.61 L11.1
N$45
  Bottom 0.813: R56.1 11.68,68.58 IC12.7 13.61,68.66 14.85,68.66 15.64,69.45 | R57.1 R58.2 14.39,71.5 15.64,70.25 | 16.04,69.85 IC12.1 | 15.64,69.45 16.04,69.85 | 15.64,70.25 16.04,69.85 | 15.64,69.45 15.64,70.25
N$46
  Bottom 0.813: IC12.8 13.43,69.95 12.95,69.95 11.4,71.5 R58.1
N$47
  Bottom 0.813: IC12.3 26.67,67.31 C34.1
N$48
  Bottom 0.813: IC12.2 20.57,68.58 D12.C 21.97,70.61 L12.1
N$49
  Bottom 0.813: R61.1 78.49,87.63 IC13.7 80.41,87.71 81.65,87.71 82.44,88.5 | R62.1 R63.2 81.19,90.55 82.44,89.3 | 82.84,88.9 IC13.1 | 82.44,88.5 82.84,88.9 | 82.44,89.3 82.84,88.9 | 82.44,88.5 82.44,89.3
N$50
  Bottom 0.813: IC13.8 80.23,89 79.75,89 78.2,90.55 R63.1
N$51
  Bottom 0.813: IC13.3 93.47,86.36 C37.1
N$52
  Bottom 0.813: IC13.2 87.38,87.63 D13.C 88.77,89.66 L13.1
N$53
  Bottom 0.813: R66.1 45.21,87.63 IC14.7 47.13,87.71 48.38,87.71 49.17,88.5 | R67.1 R68.2 47.92,90.55 49.17,89.3 | 49.57,88.9 IC14.1 | 49.17,88.5 49.57,88.9 | 49.17,89.3 49.57,88.9 | 49.17,88.5 49.17,89.3
N$54
  Bottom 0.813: IC14.8 46.95,89 46.48,89 44.93,90.55 R68.1
N$55
  Bottom 0.813: IC14.3 60.2,86.36 C40.1
N$56
  Bottom 0.813: IC14.2 54.1,87.63 D14.C 55.5,89.66 L14.1
N$57
  Bottom 0.813: R71.1 11.68,87.63 IC15.7 13.61,87.71 14.85,87.71 15.64,88.5 | R72.1 R73.2 14.39,90.55 15.64,89.3 | 16.04,88.9 IC15.1 | 15.64,88.5 16.04,88.9 | 15.64,89.3 16.04,88.9 | 15.64,88.5 15.64,89.3
N$58
  Bottom 0.813: IC15.8 13.43,89 12.95,89 11.4,90.55 R73.1
N$59
  Bottom 0.813: IC15.3 26.67,86.36 C43.1
N$60
  Bottom 0.813: IC15.2 20.57,87.63 D15.C 21.97,89.66 L15.1